# EAGLE board driver_controller (EAGLE 6.5.0)
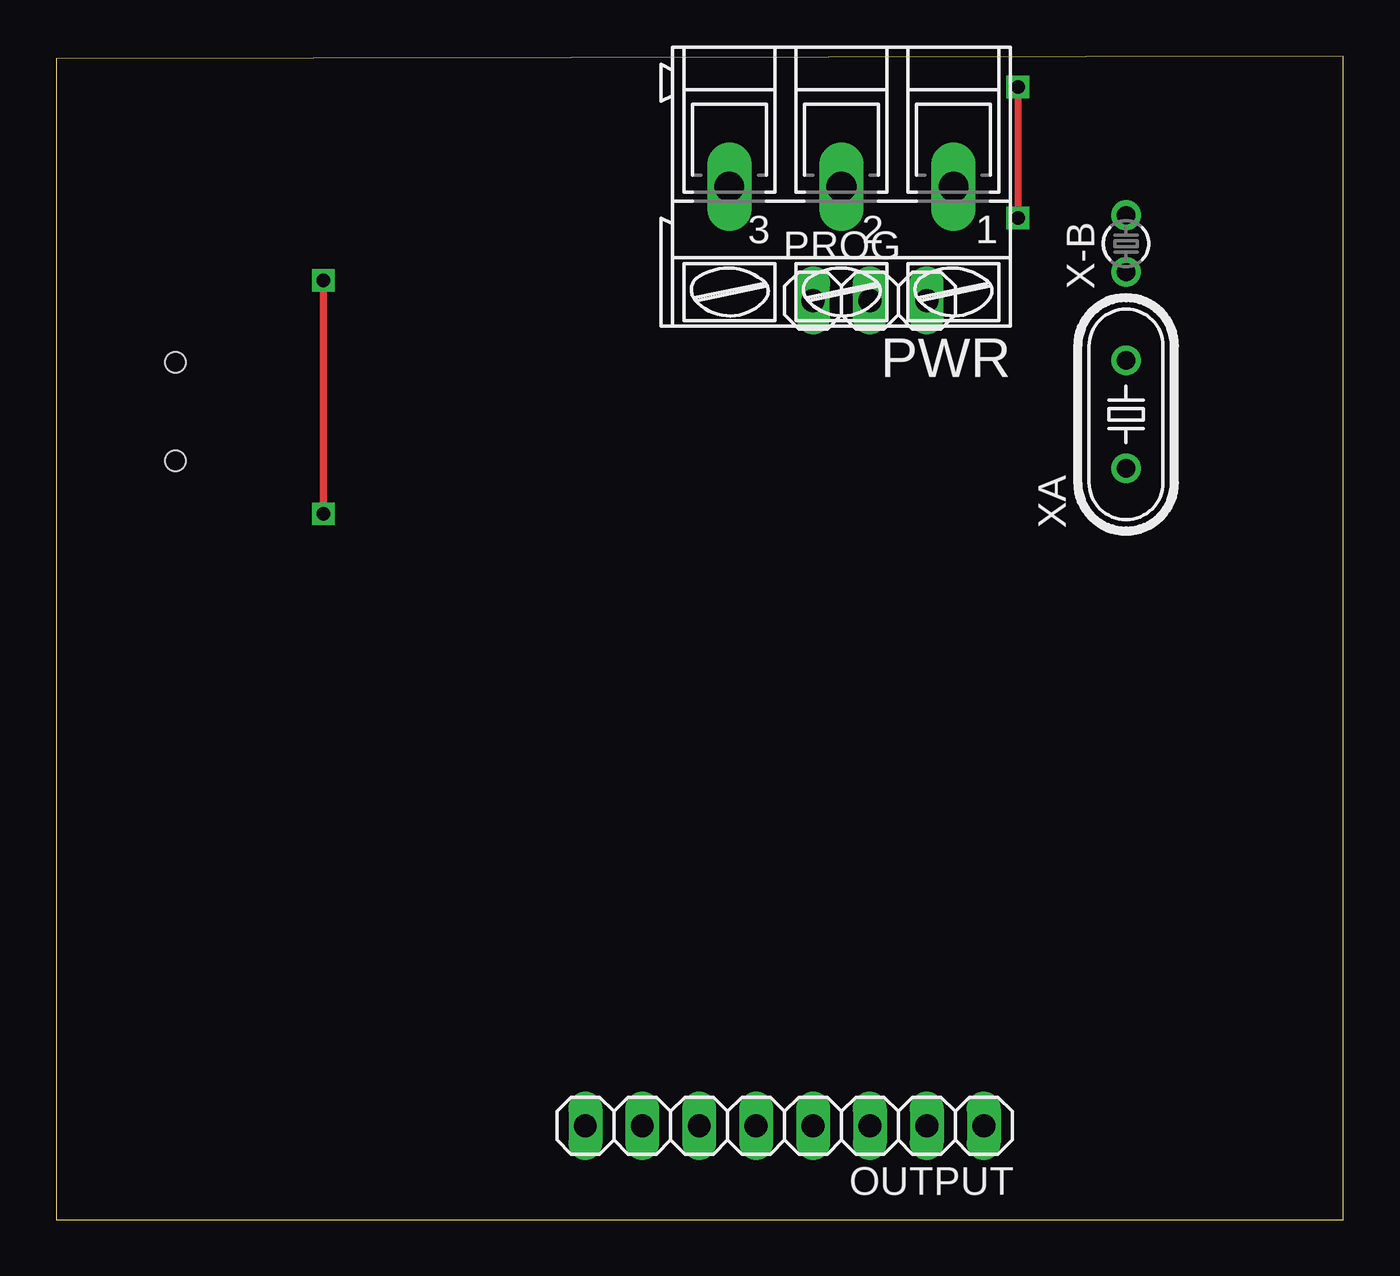
[diagram p0: board, top side]
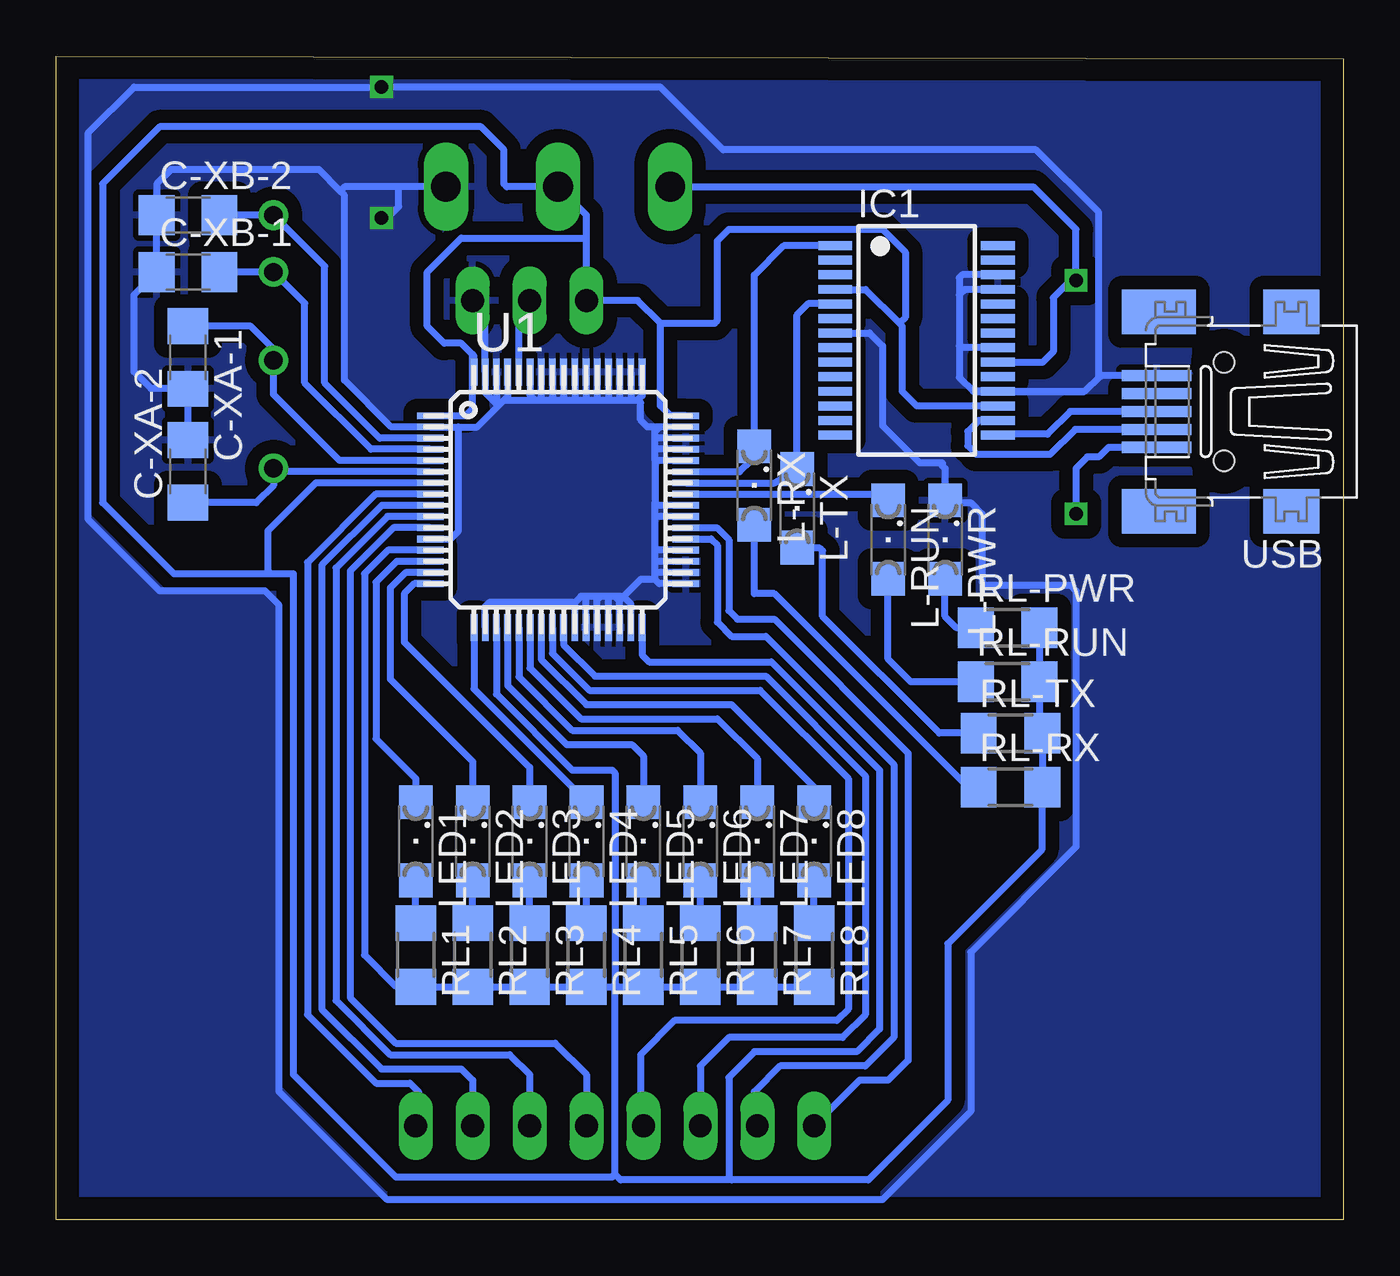
[diagram p1: board, bottom side, seen from below]

Size 57.45 x 51.93 mm. Coordinates in mm from the lower left corner, seen from the top.
Outline: 0,0 57.45,0 57.45,51.93 0,51.81 0,0
Copper layers (1*16): Top 0.035mm / dielectric 1.5mm / Bottom 0.035mm
Design rules "default": minimum track width 10mil, minimum drill 24mil, track to track 8mil, track to pad 8mil, pad to pad 8mil, via to via 8mil, smd to smd 8mil, copper to edge 40mil, drill to drill 8mil, minimum pad ring 10mil, minimum via ring 8mil, stop-mask expansion 4mil, vias tented up to drill 0mil, thermal gap 10mil

## Footprints (pad centres in the part's own frame; a part is rotated, then mirrored left to right if it is on the bottom)
C1206 = smd 1.6 x 1.8: 1 -1.4,0; 2 1.4,0
SSOP28 = smd 0.4 x 1.5: 1 -4.225,-3.625; 2 -3.575,-3.625; 3 -2.925,-3.625; 4 -2.275,-3.625; 5 -1.625,-3.625; 6 -0.975,-3.625; 7 -0.325,-3.625; 8 0.325,-3.625; 9 0.975,-3.625; 10 1.625,-3.625; 11 2.275,-3.625; 12 2.925,-3.625; 13 3.575,-3.625; 14 4.225,-3.625; 15 4.225,3.625; 16 3.575,3.625; 17 2.925,3.625; 18 2.275,3.625; 19 1.625,3.625; 20 0.975,3.625; 21 0.325,3.625; 22 -0.325,3.625; 23 -0.975,3.625; 24 -1.625,3.625; 25 -2.275,3.625; 26 -2.925,3.625; 27 -3.575,3.625; 28 -4.225,3.625
SML1206 = smd 1.5 x 1.5: A 1.75,0; C -1.75,0
1X08 = drill 1.016 long: 1 -8.89,0; 2 -6.35,0; 3 -3.81,0; 4 -1.27,0; 5 1.27,0; 6 3.81,0; 7 6.35,0; 8 8.89,0
1X03 = drill 1.016 long: 1 -2.54,0; 2 0,0; 3 2.54,0
AK300/3 = drill 1.321 long: 1 -5.004,0; 2 0,0; 3 5.004,0
R1206 = smd 1.6 x 1.803: 1 -1.422,0; 2 1.422,0
TQFP64 = smd 1.2 x 0.3: 1 -5.7,3.75; 2 -5.7,3.25; 3 -5.7,2.75; 4 -5.7,2.25; 5 -5.7,1.75; 6 -5.7,1.25; 7 -5.7,0.75; 8 -5.7,0.25; 9 -5.7,-0.25; 10 -5.7,-0.75; 11 -5.7,-1.25; 12 -5.7,-1.75; 13 -5.7,-2.25; 14 -5.7,-2.75; 15 -5.7,-3.25; 16 -5.7,-3.75; 33 5.7,-3.75; 34 5.7,-3.25; 35 5.7,-2.75; 36 5.7,-2.25; 37 5.7,-1.75; 38 5.7,-1.25; 39 5.7,-0.75; 40 5.7,-0.25; 41 5.7,0.25; 42 5.7,0.75; 43 5.7,1.25; 44 5.7,1.75; 45 5.7,2.25; 46 5.7,2.75; 47 5.7,3.25; 48 5.7,3.75 | smd 0.3 x 1.2: 17 -3.75,-5.7; 18 -3.25,-5.7; 19 -2.75,-5.7; 20 -2.25,-5.7; 21 -1.75,-5.7; 22 -1.25,-5.7; 23 -0.75,-5.7; 24 -0.25,-5.7; 25 0.25,-5.7; 26 0.75,-5.7; 27 1.25,-5.7; 28 1.75,-5.7; 29 2.25,-5.7; 30 2.75,-5.7; 31 3.25,-5.7; 32 3.75,-5.7; 49 3.75,5.7; 50 3.25,5.7; 51 2.75,5.7; 52 2.25,5.7; 53 1.75,5.7; 54 1.25,5.7; 55 0.75,5.7; 56 0.25,5.7; 57 -0.25,5.7; 58 -0.75,5.7; 59 -1.25,5.7; 60 -1.75,5.7; 61 -2.25,5.7; 62 -2.75,5.7; 63 -3.25,5.7; 64 -3.75,5.7
32005-201 = smd 3.1 x 0.5: 1 3,1.6; 2 3,0.8; 3 3,0; 4 3,-0.8; 5 3,-1.6 | smd 2.5 x 2: M1 -3,-4.45; M2 -3,4.45 | smd 3.3 x 2: M3 2.9,4.45; M4 2.9,-4.45 | hole 0.9: 0,2.2; 0,-2.2
TC26V = drill 0.813: 1 -1.27,0; 2 1.27,0
HC49/S = drill 0.813: 1 -2.413,0; 2 2.413,0

## Placement (x,y rotation side)
C-XA-1  22p  [C1206]  51.56,38.48 270 bottom
C-XA-2  22p  [C1206]  51.56,33.4 90 bottom
C-XB-1  22p  [C1206]  51.56,42.29 0 bottom
C-XB-2  22p  [C1206]  51.56,44.83 0 bottom
IC1  FT232RL  [SSOP28]  19.05,39.24 270 bottom
L-PWR  [SML1206]  17.78,30.35 270 bottom
L-RUN  [SML1206]  20.32,30.35 270 bottom
L-RX  [SML1206]  26.29,32.77 270 bottom
L-TX  [SML1206]  24.38,31.75 270 bottom
LED1  [SML1206]  41.4,16.89 270 bottom
LED2  [SML1206]  38.86,16.89 270 bottom
LED3  [SML1206]  36.32,16.89 270 bottom
LED4  [SML1206]  33.78,16.89 270 bottom
LED5  [SML1206]  31.24,16.89 270 bottom
LED6  [SML1206]  28.7,16.89 270 bottom
LED7  [SML1206]  26.16,16.89 270 bottom
LED8  [SML1206]  23.62,16.89 270 bottom
OUTPUT  [1X08]  32.51,4.19 180 top
PROG  [1X03]  36.32,41.02 0 top
PWR  [AK300/3]  35.05,46.1 180 top
RL1  330  [R1206]  41.4,11.81 270 bottom
RL2  330  [R1206]  38.86,11.81 270 bottom
RL3  330  [R1206]  36.32,11.81 270 bottom
RL4  330  [R1206]  33.78,11.81 270 bottom
RL5  330  [R1206]  31.24,11.81 270 bottom
RL6  330  [R1206]  28.7,11.81 270 bottom
RL7  330  [R1206]  26.16,11.81 270 bottom
RL8  330  [R1206]  23.62,11.81 270 bottom
RL-PWR  330  [R1206]  14.99,26.42 0 bottom
RL-RUN  330  [R1206]  14.99,24 0 bottom
RL-RX  330  [R1206]  14.86,19.3 0 bottom
RL-TX  330  [R1206]  14.86,21.72 0 bottom
U1  STM32F10XRXT6  [TQFP64]  35.05,32.13 0 bottom
USB  MINI-USB-32005-201  [32005-201]  5.33,36.07 180 bottom
X-B  32khz  [TC26V]  47.75,43.56 90 top
XA  8mhz  [HC49/S]  47.75,35.94 90 top

## Library data of the parts
C-XA-1 C-XA-2 C-XB-1 C-XB-2 RL1-RL8 RL-PWR RL-RUN RL-RX RL-TX = resistor
IC1 = ftdichip; MPN: FT232RL; OC_FARNELL: 1146032; OC_NEWARK: 91K9918
L-PWR L-RUN L-RX L-TX LED1-LED8 = led
OUTPUT PROG = pinhead
PWR = con-ptr500; OC_FARNELL: unknown; OC_NEWARK: unknown
U1 = stm32
USB = con-cypressindustries; OC_FARNELL: unknown; OC_NEWARK: unknown
X-B = crystal; OC_FARNELL: unknown; OC_NEWARK: unknown
XA = crystal; OC_FARNELL: 1667008; OC_NEWARK: unknown

## Nets
DM: IC1.16 USB.2
DP: IC1.15 USB.3
L1: LED1.C U1.14
L2: LED2.C U1.15
L3: LED3.C U1.16
L4: LED4.C U1.17
L5: LED5.C U1.20
L6: LED6.C U1.21
L7: LED7.C U1.22
L8: LED8.C U1.23
L-RUN: L-RUN.C U1.41
N$2: PROG.2 U1.60
N$3: C-XB-1.2 U1.4 X-B.1
N$4: C-XB-2.2 U1.3 X-B.2
N$5: LED1.A RL1.1
N$6: C-XA-2.1 U1.6 XA.1
N$7: C-XA-1.1 U1.5 XA.2
N$8: LED2.A RL2.1
N$9: L-PWR.A RL-PWR.1
N$10: LED3.A RL3.1
N$11: LED4.A RL4.1
N$12: LED5.A RL5.1
N$13: LED6.A RL6.1
N$14: LED7.A RL7.1
N$15: LED8.A RL8.1
N$16: L-RUN.A RL-RUN.1
N$17: L-TX.A RL-TX.1
N$18: L-RX.A RL-RX.1
O1: OUTPUT.1 U1.8
O2: OUTPUT.2 U1.9
O3: OUTPUT.3 U1.10
O4: OUTPUT.4 U1.11
O5: OUTPUT.5 U1.24
O6: OUTPUT.6 U1.25
O7: OUTPUT.7 U1.37
O8: OUTPUT.8 U1.38
RX: IC1.1 L-RX.C U1.43
TX: IC1.5 L-TX.C U1.42
VCC: IC1.20 PWR.3 USB.1
VDD: IC1.4 IC1.17 PROG.1 PWR.2 RL1.2 RL2.2 RL3.2 RL4.2 RL5.2 RL6.2 RL7.2 RL8.2 RL-PWR.2 RL-RUN.2 RL-RX.2 RL-TX.2 U1.1 U1.7 U1.13 U1.19 U1.32 U1.48 U1.64
VSS: C-XA-1.2 C-XA-2.2 C-XB-1.1 C-XB-2.1 IC1.7 IC1.18 IC1.21 IC1.25 IC1.26 L-PWR.C PROG.3 PWR.1 U1.2 U1.12 U1.18 U1.26 U1.27 U1.28 U1.29 U1.30 U1.31 U1.33 U1.34 U1.35 U1.36 U1.39 U1.40 U1.44 U1.45 U1.46 U1.47 U1.49 U1.50 U1.51 U1.52 U1.53 U1.54 U1.55 U1.56 U1.57 U1.58 U1.59 U1.61 U1.62 U1.63 USB.5

## Tracks (layer width: path | path; a pad name or v marks a point on that pad's centre or on a via)
DM
  Bottom 0.305: IC1.16 16.27,35.67 16.76,35.18 16.76,34.54 16.38,34.16 13.08,34.16 11.98,35.27 USB.2
DP
  Bottom 0.305: USB.3 12.19,36.07 13.21,35.05 15.39,35.05 IC1.15
L1
  Bottom 0.305: U1.14 42.25,29.38 43.18,28.45 43.18,21.46 41.4,19.68 LED1.C
L2
  Bottom 0.305: U1.15 41.86,28.88 42.54,28.19 42.54,24.13 38.86,20.45 LED2.C
L3
  Bottom 0.305: U1.16 41.47,28.38 41.91,27.94 41.91,25.78 36.32,20.19 LED3.C
L4
  Bottom 0.305: U1.17 38.8,23.69 34.42,19.3 34.42,19.28 LED4.C
L5
  Bottom 0.305: U1.20 37.3,23.84 34.67,21.21 31.75,21.21 31.24,20.7 LED5.C
L6
  Bottom 0.305: U1.21 36.8,24.23 34.42,21.84 29.72,21.84 28.7,20.83 LED6.C
L7
  Bottom 0.305: U1.22 36.3,24.62 34.04,22.35 27.94,22.35 26.16,20.57 LED7.C
L8
  Bottom 0.305: U1.23 35.8,25.01 33.78,22.99 27.3,22.99 23.62,19.3 LED8.C
L-RUN
  Bottom 0.305: 20.55,31.87 L-RUN.C 20.6,32.38 U1.41
N$2
  Bottom 0.305: U1.60 36.8,40.54 PROG.2
N$3
  Bottom 0.305: U1.4 43.4,34.38 46.35,37.34 46.35,40.89 X-B.1 C-XB-1.2
N$4
  Bottom 0.305: U1.3 43.01,34.88 45.47,37.34 45.47,42.55 X-B.2 C-XB-2.2
N$5
  Bottom 0.305: RL1.1 LED1.A
N$6
  Bottom 0.305: U1.6 47.6,33.38 XA.1 47.75,32.77 48.51,32 C-XA-2.1
N$7
  Bottom 0.305: U1.5 44.8,33.88 47.75,36.83 XA.2 47.75,38.86 48.77,39.88 C-XA-1.1
N$8
  Bottom 0.305: RL2.1 LED2.A
N$9
  Bottom 0.305: RL-PWR.1 17.27,26.42 17.78,26.92 L-PWR.A
N$10
  Bottom 0.305: RL3.1 LED3.A
N$11
  Bottom 0.305: RL4.1 LED4.A
N$12
  Bottom 0.305: RL5.1 LED5.A
N$13
  Bottom 0.305: RL6.1 LED6.A
N$14
  Bottom 0.305: RL7.1 LED7.A
N$15
  Bottom 0.305: RL8.1 LED8.A
N$16
  Bottom 0.305: RL-RUN.1 19.3,24 20.32,25.02 L-RUN.A
N$17
  Bottom 0.305: RL-TX.1 18.03,21.72 23.24,26.92 23.24,29.85 23.37,29.97 24.36,29.97 L-TX.A
N$18
  Bottom 0.305: RL-RX.1 16.76,19.3 25.4,27.94 26.29,27.94 L-RX.A
O1
  Bottom 0.305: U1.8 43.18,32.38 46.23,29.34 46.23,9.14 43.18,6.1 41.66,6.1 41.27,5.71 41.27,4.32 OUTPUT.1
O2
  Bottom 0.305: U1.9 42.92,31.88 45.59,29.21 45.59,9.4 42.93,6.73 39.37,6.73 38.86,6.22 OUTPUT.2
O3
  Bottom 0.305: U1.10 42.66,31.38 44.96,29.08 44.96,9.78 42.54,7.37 37.21,7.37 36.32,6.48 OUTPUT.3
O4
  Bottom 0.305: U1.11 42.4,30.88 44.32,28.96 44.32,9.91 42.29,7.87 35.18,7.87 33.78,6.48 OUTPUT.4
O5
  Bottom 0.305: U1.24 35.3,25.27 33.66,23.62 26.03,23.62 22.1,19.68 22.1,9.4 22.61,8.89 29.84,8.89 31.37,7.37 31.37,4.32 OUTPUT.5
O6
  Bottom 0.305: U1.25 34.8,25.66 33.4,24.26 25.78,24.26 21.34,19.81 21.34,9.14 22.35,8.13 27.43,8.13 28.7,6.86 OUTPUT.6
O7
  Bottom 0.305: U1.37 28.22,30.38 27.94,30.1 27.94,26.67 27.3,26.04 25.78,26.04 20.07,20.32 20.07,8.13 21.34,6.86 25.15,6.86 26.29,5.71 26.29,4.32 OUTPUT.7
O8
  Bottom 0.305: U1.38 27.96,30.88 27.43,30.35 27.43,27.18 27.05,26.8 25.4,26.8 19.43,20.83 19.43,7.11 20.32,6.22 21.59,6.22 OUTPUT.8
RX
  Bottom 0.305: U1.43 26.94,33.38 26.42,33.91 26.42,34.39 L-RX.C 26.29,42.16 24.98,43.47 IC1.1
TX
  Bottom 0.305: U1.42 25.38,32.88 L-TX.C 24.38,40.39 23.88,40.89 22.7,40.89 IC1.5
VCC  (via drill 0.6)
  Top 0.305: v11.94,31.5 v11.94,41.91
  Bottom 0.305: USB.1 10.49,34.47 10.92,34.04 11.43,34.04 11.94,33.53 v11.94,31.5 | IC1.20 13.42,38.27 12.95,38.73 12.95,41.15 12.19,41.91 v11.94,41.91 11.94,44.2 13.84,46.1 PWR.3
VDD
  Bottom 0.305: 32.64,10.39 RL4.2 RL3.2 RL2.2 RL1.2 41.43,10.41 42.29,10.41 43.69,11.81 43.69,28.83 42.64,29.88 U1.13 | 32.64,10.39 32.38,10.39 | 32.38,10.39 RL5.2 RL6.2 RL7.2 RL8.2 | 38.86,37.77 38.86,36.19 39.18,35.88 U1.1 | 38.86,37.77 U1.64 38.8,38.55 38.86,38.61 | U1.19 37.8,23.45 34.42,20.07 32.64,20.07 32.51,19.94 32.51,10.52 32.38,10.39 | 33.78,43.81 PROG.1 31.5,41.02 30.48,40 | U1.48 30.04,35.88 30.48,36.32 30.48,40 | 38.86,37.77 38.86,38.61 | 38.86,38.61 39.37,39.12 40.13,39.12 40.89,39.88 40.89,42.29 39.37,43.81 33.78,43.81 | 33.78,43.81 33.78,44.83 PWR.2 37.34,46.1 37.46,46.23 37.46,47.75 38.48,48.77 52.83,48.77 55.37,46.23 55.37,32 52.2,28.83 47.88,28.83 | 47.88,28.83 46.86,28.83 46.86,6.48 42.29,1.9 32.64,1.9 32.51,2.03 | 32.51,2.03 32.51,10.26 32.64,10.39 | 27.3,1.78 21.21,1.78 17.65,5.33 17.65,12.32 13.46,16.51 13.46,19.43 | 27.3,1.78 32.26,1.78 32.51,2.03 | IC1.17 19.05,36.32 19.69,36.96 19.69,39.88 19.81,40 | 19.81,40 21.32,41.52 IC1.4 | 30.48,40 28.07,40 27.94,40.13 27.94,43.69 27.43,44.2 20.57,44.2 19.56,43.18 19.56,40.26 19.81,40 | U1.7 45.86,32.88 48.01,30.73 48.01,28.96 47.88,28.83 | U1.32 31.3,25.21 30.99,24.89 25.53,24.89 20.7,20.07 20.7,8.51 21.72,7.49 26.29,7.49 27.43,6.35 27.43,1.9 27.3,1.78 | RL-PWR.2 RL-RUN.2 13.56,21.59 | 13.59,20.96 13.56,20.98 13.56,21.59 | RL-TX.2 RL-RX.2 | RL-TX.2 13.44,19.46 13.46,19.43 | 13.46,19.43 13.46,19.56 13.59,19.68 13.59,19.56 13.46,19.43 | 13.56,21.59 RL-TX.2
VSS  (via drill 0.6)
  Top 0.305: v42.93,50.55 v42.93,44.7
  Bottom 0.305: C-XA-2.2 C-XA-1.2 53.21,37.08 53.97,37.85 53.97,41.28 C-XB-1.1 C-XB-2.1 52.96,46.23 52.32,46.86 45.72,46.86 44.77,45.91 | U1.31 31.8,27.48 32.13,27.81 | 32.13,27.81 32.51,27.81 | 32.51,27.81 32.89,27.81 | 32.89,27.81 33.15,27.81 | 33.15,27.81 33.78,27.81 | 33.78,27.81 34.04,27.81 34.3,27.55 | U1.26 34.3,27.55 | U1.27 33.8,27.79 33.78,27.81 | U1.28 33.3,27.66 33.15,27.81 | U1.29 32.8,27.72 32.89,27.81 | U1.30 32.3,27.6 32.51,27.81 | U1.33 30.54,28.38 30.73,28.57 | 30.73,28.57 30.73,28.83 | 30.73,28.83 30.73,29.34 | 30.73,29.34 30.73,29.85 | 30.73,29.85 30.73,31.37 | 30.73,31.37 30.73,31.88 | 30.73,31.88 30.73,32 | 30.73,33.91 30.73,34.42 | 30.73,34.42 30.73,34.92 | 30.73,34.92 30.73,35.18 30.53,35.38 | U1.46 30.69,34.88 30.73,34.92 | U1.45 30.7,34.38 30.73,34.42 | U1.44 30.71,33.88 30.73,33.91 | U1.40 30.73,31.88 | U1.39 30.72,31.38 30.73,31.37 | U1.36 30.7,29.88 30.73,29.85 | U1.35 30.69,29.38 30.73,29.34 | U1.34 30.68,28.88 30.73,28.83 | 30.73,28.57 31.37,28.57 32.13,27.81 | U1.59 36.3,36.81 36.07,36.58 35.69,36.58 | 35.69,36.58 35.18,36.58 | 35.18,36.58 34.92,36.58 | 34.92,36.58 34.29,36.58 | 34.29,36.58 33.78,36.58 | 33.78,36.58 33.27,36.58 | 33.27,36.58 32.89,36.58 | 32.89,36.58 32.38,36.58 | 32.38,36.58 31.75,36.58 | 31.75,36.58 31.5,36.58 | 31.5,36.58 31.3,36.77 U1.49 | U1.50 31.8,36.63 31.75,36.58 | U1.51 32.3,36.66 32.38,36.58 | U1.52 32.8,36.67 32.89,36.58 | U1.53 33.3,36.6 33.27,36.58 | U1.54 33.8,36.6 33.78,36.58 | U1.55 34.3,36.59 34.29,36.58 | U1.56 34.8,36.7 34.92,36.58 | U1.57 35.3,36.7 35.18,36.58 | U1.58 35.8,36.69 | 35.8,36.69 35.69,36.58 | 30.53,35.38 31.06,35.38 31.37,35.69 31.37,36.45 31.5,36.58 | 37.46,36.58 37.59,36.45
  Bottom 0.305: 37.59,36.45 37.85,36.45 | U1.62 37.8,36.49 37.85,36.45 | 37.85,36.45 38.3,36.91 U1.63 38.3,40.46 PROG.3 | U1.61 37.3,36.74 37.46,36.58 | 37.46,36.58 35.92,36.58 35.8,36.69 | 39.5,35.38 U1.2 42.49,35.38 44.58,37.47 44.58,45.72 44.77,45.91 | 39.5,35.38 38.66,35.38 37.59,36.45 | U1.12 39.85,30.38 39.5,30.73 39.5,35.38 | U1.18 38.3,27.36 38.1,27.56 34.31,27.56 34.3,27.55 | IC1.26 17.01,42.17 17.14,42.04 17.14,41.28 | 17.14,41.28 17.14,38.99 | 16.52,36.97 17.14,37.59 17.14,38.99 | 16.52,36.97 IC1.18 11.55,36.97 | IC1.21 17.07,38.92 17.14,38.99 | IC1.25 16.9,41.52 17.14,41.28 | 30.73,33.91 30.73,32 | 30.73,32 30.61,31.88 | U1.47 30.53,35.38 | USB.5 10.85,37.67 10.92,37.59 | 10.92,37.59 11.55,36.97 | PWR.1 42.16,46.1 | 42.16,46.1 44.58,46.1 44.77,45.91 | IC1.7 21.15,39.57 20.57,38.99 20.57,35.43 18.92,33.78 18.03,33.78 | 18.03,33.78 17.91,33.66 | 17.78,32.13 L-PWR.C | 16.52,36.97 16.51,36.96 11.56,36.96 11.55,36.97 | 10.92,37.59 10.92,44.96 13.72,47.75 27.69,47.75 30.48,50.55 v42.93,50.55 53.97,50.55 56.01,48.51 56.01,31.24 52.83,28.07 48.13,28.07 47.5,27.43 47.5,5.71 42.67,0.89 20.57,0.89 16.64,4.83 16.64,11.94 11.94,16.64 11.94,28.07 12.19,28.32 16,28.32 16.13,28.45 16.13,31.5 16.64,32 17.65,32 17.78,32.13 | v42.93,44.7 42.67,44.7 42.16,45.21 42.16,46.1 | 18.03,33.78 17.91,33.78 17.91,33.66 | 17.91,33.66 17.78,33.53 17.78,32.13
  pour Bottom (isolate 0.61): 0.25,51.82 57.02,51.82 57.02,0.13 0.25,0.13